# EAGLE board PCB_2.1 (EAGLE 8.6.3)
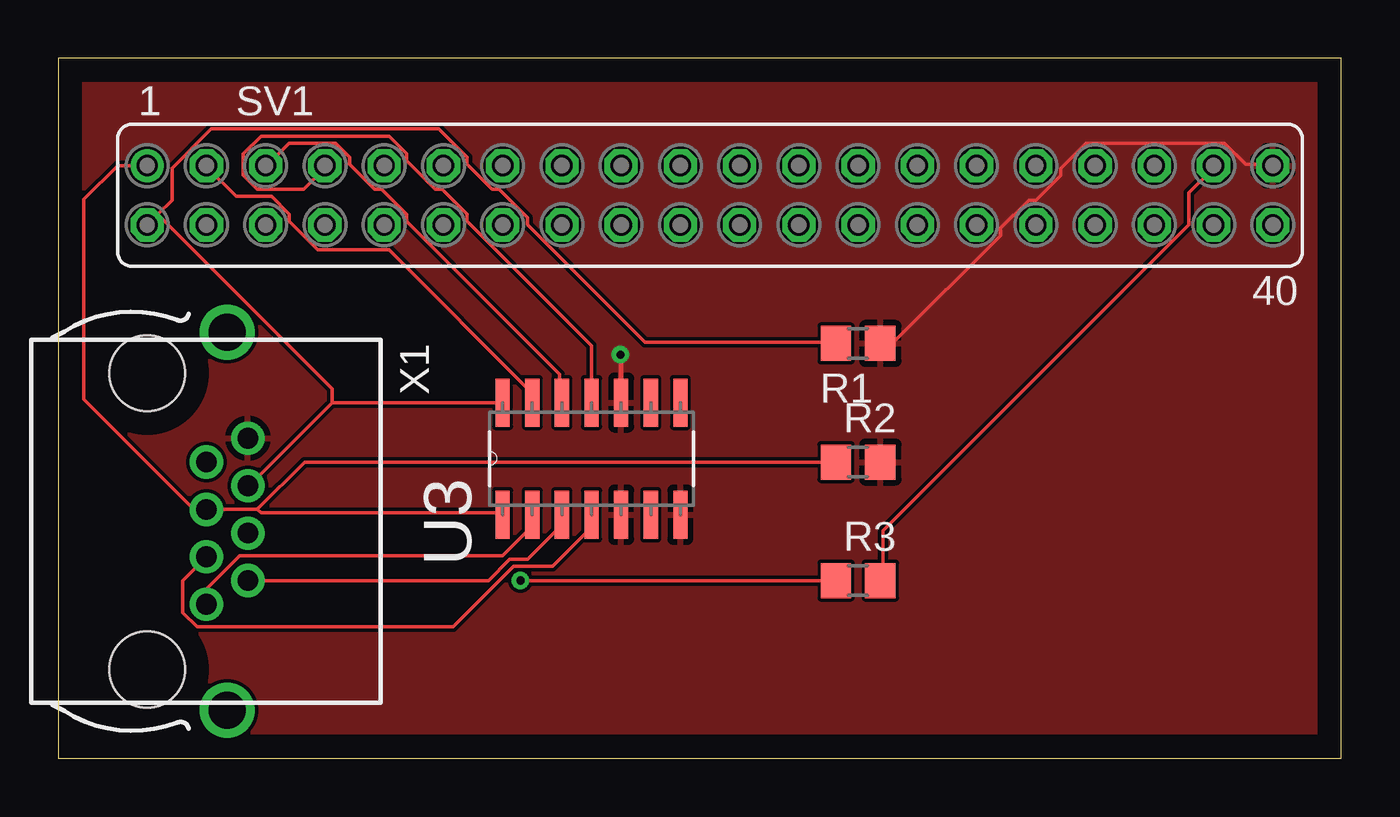
[diagram p0: board, top side]
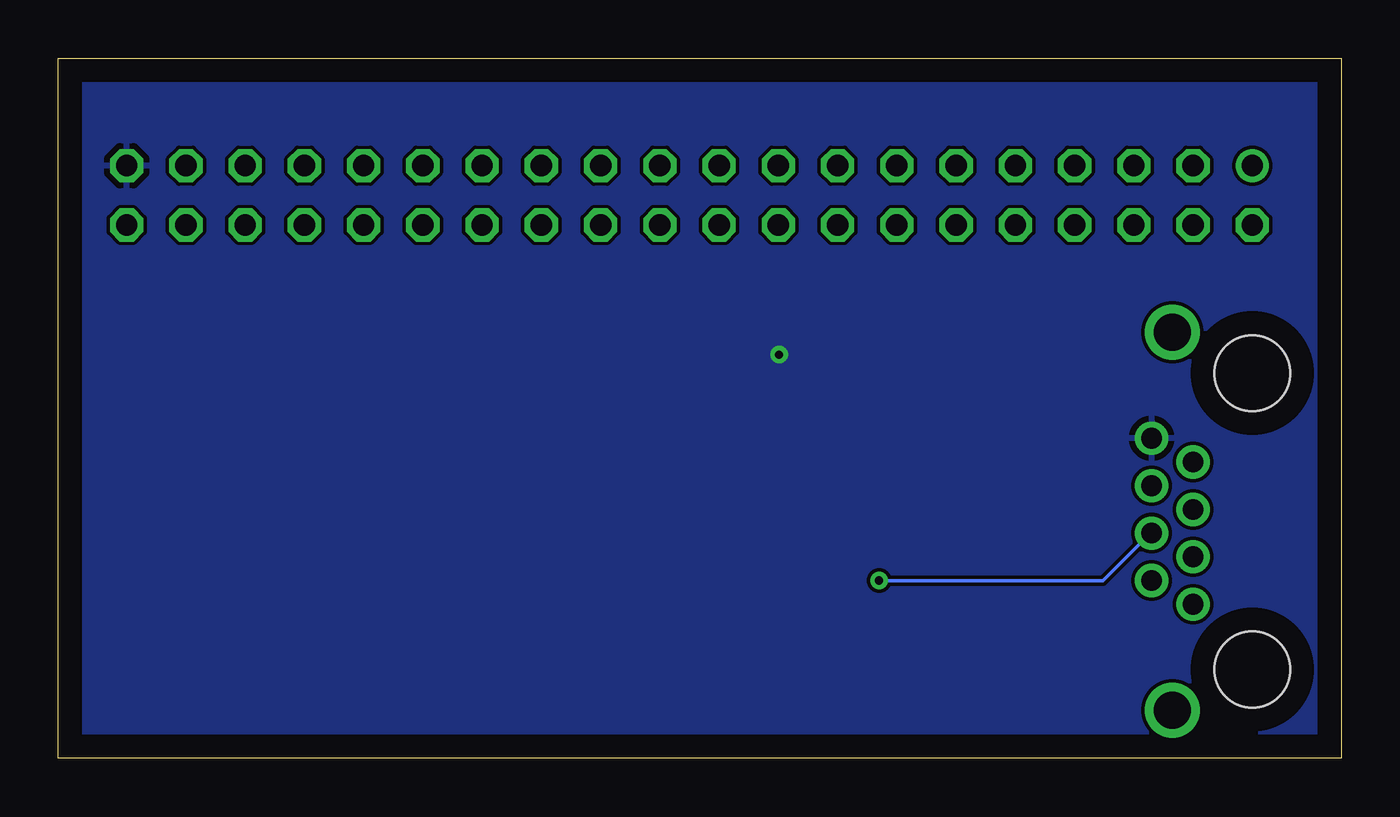
[diagram p1: board, bottom side, seen from below]

Size 55 x 30 mm. Coordinates in mm from the lower left corner, seen from the top.
Outline: 0,0 55,0 55,30 0,30 0,0
Copper layers (1*16): Top 0.035mm / dielectric 1.5mm / Bottom 0.035mm
Design rules "default *": minimum track width 6mil, minimum drill 0.35mm, track to track 6mil, track to pad 6mil, pad to pad 6mil, via to via 6mil, smd to smd 6mil, copper to edge 40mil, drill to drill 6mil, minimum pad ring 10mil, minimum via ring 8mil, stop-mask expansion 4mil, vias tented up to drill 0mil, thermal gap 10mil

## Footprints (pad centres in the part's own frame; a part is rotated, then mirrored left to right if it is on the bottom)
R0805 = smd 1.3 x 1.5: 1 -0.95,0; 2 0.95,0
FE20-2 = drill 0.914: 1 -24.13,1.27 | drill 0.914 octagon: 2 -24.13,-1.27; 3 -21.59,1.27; 4 -21.59,-1.27; 5 -19.05,1.27; 6 -19.05,-1.27; 7 -16.51,1.27; 8 -16.51,-1.27; 9 -13.97,1.27; 10 -13.97,-1.27; 11 -11.43,1.27; 12 -11.43,-1.27; 13 -8.89,1.27; 14 -8.89,-1.27; 15 -6.35,1.27; 16 -6.35,-1.27; 17 -3.81,1.27; 18 -3.81,-1.27; 19 -1.27,1.27; 20 -1.27,-1.27; 21 1.27,1.27; 22 1.27,-1.27; 23 3.81,1.27; 24 3.81,-1.27; 25 6.35,1.27; 26 6.35,-1.27; 27 8.89,1.27; 28 8.89,-1.27; 29 11.43,1.27; 30 11.43,-1.27; 31 13.97,1.27; 32 13.97,-1.27; 33 16.51,1.27; 34 16.51,-1.27; 35 19.05,1.27; 36 19.05,-1.27; 37 21.59,1.27; 38 21.59,-1.27; 39 24.13,1.27; 40 24.13,-1.27
SOIC127P600X175-14N = smd 2.057 x 0.61: 1 -4.801,7.62; 2 -4.801,6.35; 3 -4.801,5.08; 4 -4.801,3.81; 5 -4.801,2.54; 6 -4.801,1.27; 7 -4.801,0; 8 0,0; 9 0,1.27; 10 0,2.54; 11 0,3.81; 12 0,5.08; 13 0,6.35; 14 0,7.62
0446200002 = drill 0.889 pad 1.422: 1 3.556,2.54; 2 2.54,4.318; 3 1.524,2.54; 4 0.508,4.318; 5 -0.508,2.54; 6 -1.524,4.318; 7 -2.54,2.54; 8 -3.556,4.318 | drill 1.575 pad 2.286: S@1 -8.103,3.429; S@2 8.103,3.429 | hole 3.251: 6.35,0; -6.35,0

## Placement (x,y rotation side)
R1  [R0805]  34.29,17.78 180 top
R2  [R0805]  34.29,12.7 0 top
R3  [R0805]  34.29,7.62 0 top
SV1  [FE20-2]  27.94,24.13 0 top
U3  TXS0104ED  [SOIC127P600X175-14N]  26.67,15.24 90 top
X1  0446200002  [0446200002]  3.81,10.16 270 top

## Library data of the parts
R1-R3 = resistor
SV1 = con-lsta; OC_FARNELL: unknown; OC_NEWARK: unknown
U3 = TXS0104ED; AVAILABILITY: Unavailable; DESCRIPTION: 4-Bit Bidirectional Voltage-Level Shifter for Open-Drain and Push-Pull Applications 14-SOIC -40 to 85; MF: Texas Instruments; MP: TXS0104ED; PACKAGE: SOIC-14 Texas Instruments; PRICE: None
X1 = 0446200002; AVAILABILITY: Unavailable; DESCRIPTION: Conn RJ-45 RCP 8 POS 2.04mm Solder RA Thru-Hole 8 Terminal 1 Port Tray Cat 3; MF: Molex, LLC; MP: 0446200002; PACKAGE: None; PRICE: None

## Nets
A1: U3.2 X1.1
A2: U3.3 X1.2
A3: U3.4 X1.3
GND: R1.1 R2.2 SV1.39 U3.5 U3.7 U3.10 X1.8
INT: SV1.7 U3.11
LED: R3.1 X1.4
N$1: R3.2 SV1.37
OE: U3.8
SCL: SV1.5 U3.12
SDA: SV1.3 U3.13
VCCA: R2.1 SV1.1 U3.1 X1.5
VCCB: R1.2 SV1.2 U3.14 X1.6

## Tracks (layer width: path | path; a pad name or v marks a point on that pad's centre or on a via)
A1
  Top 0.152: U3.2 20.27,10.36 20.27,9.91 19.05,8.69 7.77,8.69 6.4,7.32 6.4,6.71 X1.1
A2
  Top 0.152: X1.2 18.44,7.62 19.36,8.53 20.12,8.53 21.49,9.91 21.49,10.36 U3.3
A3
  Top 0.152: U3.4 22.86,9.91 21.18,8.23 19.51,8.23 16.92,5.64 5.94,5.64 5.33,6.25 5.33,7.62 X1.3
GND  (via drill 0.35)
  Top 0.152: SV1.39 51.97,25.45 50.9,25.45 49.99,26.36 44.04,26.36 42.98,25.3 42.98,24.99 41.91,23.93 41.6,23.93 40.39,22.71 40.39,22.4 35.81,17.83 35.36,17.83 R1.1
  Top 0.203: 24.1,17 24.13,17 U3.10
  other vias: 24.1,17.3
  pour Top: 0,30 55.4,30 55.4,0.1 0,0.1
  pour Bottom: 0,29.9 0,0 55.4,0 55.4,29.9
INT
  Top 0.152: U3.11 22.86,17.68 17.53,23.01 17.53,23.32 16.46,24.38 16.15,24.38 14.94,25.6 14.94,25.91 14.17,26.67 8.69,26.67 7.92,25.91 7.92,24.99 8.53,24.38 10.52,24.38 11.43,25.3 SV1.7
LED  (via drill 0.35)
  Top 0.152: v19.81,7.62 R3.1
  Bottom 0.152: v19.81,7.62 10.21,7.62 8.23,9.6 X1.4
N$1
  Top 0.152: R3.2 35.36,7.62 35.36,9.75 48.46,22.86 48.46,24.23 49.53,25.3 SV1.37
SCL
  Top 0.152: U3.12 21.49,15.24 21.49,16.46 14.94,23.01 14.94,23.32 13.87,24.38 13.56,24.38 12.5,25.45 12.5,25.76 11.89,26.36 9.91,26.36 8.99,25.45 SV1.5
SDA
  Top 0.152: U3.13 20.27,15.24 20.27,15.7 14.17,21.79 11.12,21.79 9.91,23.01 9.91,23.32 9.14,24.08 7.62,24.08 6.4,25.3 SV1.3
VCCA
  Top 0.152: 8.53,10.67 8.69,10.52 19.05,10.52 U3.1 | 8.53,10.67 X1.5 5.81,10.67 1.09,15.38 1.09,23.95 2.54,25.4 SV1.1 | R2.1 10.57,12.7 8.53,10.67
VCCB
  Top 0.152: 11.73,15.24 U3.14 | 11.73,15.24 8.23,11.73 X1.6 | 4.27,23.32 4.88,23.93 4.88,25.3 6.55,26.98 16.31,26.98 17.53,25.76 17.53,25.45 18.59,24.38 18.9,24.38 20.12,23.16 20.12,22.86 25.15,17.83 33.22,17.83 R1.2 | 11.73,15.24 11.73,15.85 4.27,23.32 | 4.27,23.32 SV1.2